# Altium PCB NumatoShield.PcbDoc (part 2 of 4)
Units mil, origin at the board's own origin, x right, y up, seen from the top; angles counter-clockwise.
Board outline 5000 x 5000 mil, 4 copper layers (Top Layer, Mid-Layer 1, Mid-Layer 2, Bottom Layer); 8 components, 163 nets, 352 pads, 43 vias.
Unrouted connection lines stored in the file: 11.
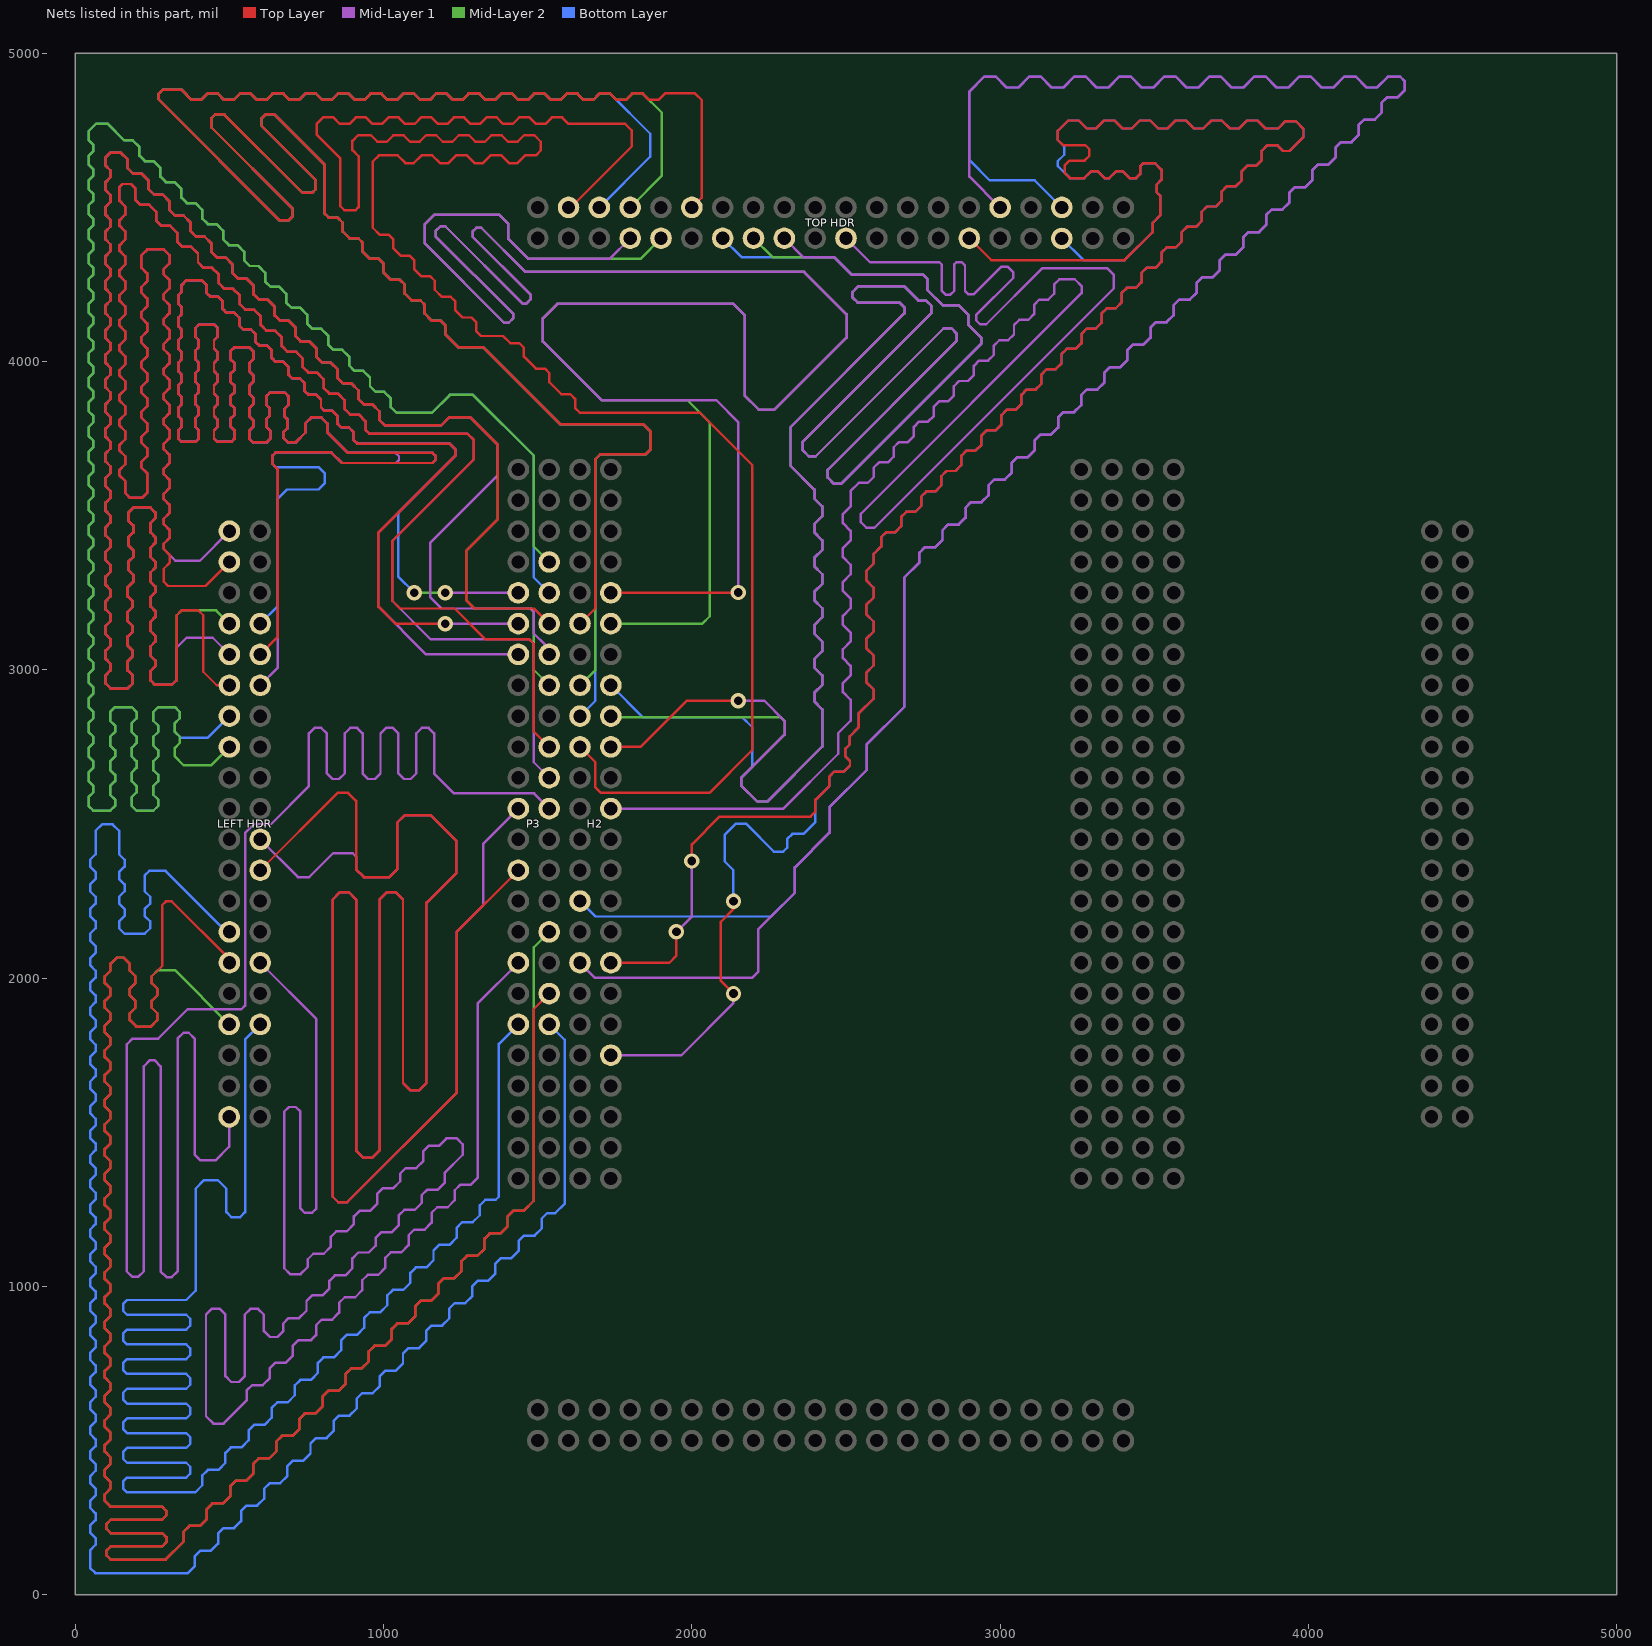
[diagram p4: the nets of this part, all layers, seen from the top]

## Via types
v1: diameter 50, hole 28, Top Layer to Bottom Layer, 43 vias

## Nets (pads, with @x,y where several pads share a name; then routed paths per layer and width w, separated by ;. In a path a pad name is that pad's centre, name@x,y a point inside that pad or via, vN(x,y) a via of type N, cw(c..) or ccw(c..) an arc to the next point about the centre after c; other vN are vias at no path point) (continued)
C13: "LEFT HDR.1" P3.29 | length 6979.7
  Top Layer w8: 500,3350 422,3272 301,3272 287,3286 287,3328 306,3347 306,3373 287,3392 287,3409 306,3428 306,3454 287,3473 287,3490 306,3509 306,3535 287,3554 287,3571 306,3590 306,3616 287,3635 287,3652 306,3671 306,3697 287,3716 287,3733 306,3752 306,3778 287,3797 287,3814 306,3833 306,3859 287,3878 287,3895 306,3914 306,3940 287,3959 287,3976 306,3995 306,4021 287,4040 287,4057 306,4076 306,4102 287,4121 287,4138 306,4157 306,4183 287,4202 287,4219 306,4238 306,4264 287,4283 287,4300 306,4319 306,4345 287,4364 234,4364 214,4344 214,4305 233,4286 233,4260 214,4241 214,4224 233,4205 233,4179 214,4160 214,4143 233,4124 233,4098 214,4079 214,4062 233,4043 233,4017 214,3998 214,3981 233,3962 233,3936 214,3917 214,3900 233,3881 233,3855 214,3836 214,3819 233,3800 233,3774 214,3755 214,3738 233,3719 233,3693 214,3674 214,3657 233,3638 233,3574 217,3558 178,3558 162,3574 162,3612 143,3631 143,3648 162,3667 162,3693 143,3712 143,3729 162,3748 162,3774 143,3793 143,3810 162,3829 162,3855 143,3874 143,3891 162,3910 162,3936 143,3955 143,3972 162,3991 162,4017 143,4036 143,4053 162,4072 162,4098 143,4117 143,4134 162,4153 162,4179 143,4198 143,4215 162,4234 162,4260 143,4279 143,4296 162,4315 162,4341 143,4360 143,4377 162,4396 162,4422 143,4441 143,4458 162,4477 162,4503 143,4522 143,4566 153,4576 181,4576 194,4563 194,4526 212,4508 240,4508 262,4486 262,4458 280,4440 308,4440 330,4418 330,4390 348,4372 376,4372 398,4350 398,4322 416,4304 444,4304 466,4282 466,4254 484,4236 512,4236 534,4214 534,4186 552,4168 580,4168 602,4146 602,4118 620,4100 648,4100 670,4078 670,4050 688,4032 716,4032 738,4010 738,3982 756,3964 784,3964 806,3942 806,3914 824,3896 852,3896 874,3874 874,3846 892,3828 920,3828 942,3806 942,3778 954,3766 1272,3766 1293,3745 1293,3683 1028,3418 1028,3224 1053,3199 1231,3199 1331,3099 1473,3099 1487,3085 1487,2800.2 P3.29@1537.2,2750
C14: "TOP HDR.36" H2.34 | length 6961
  Mid-Layer 2 w8: H2.34@1637.2,2950 1687,2999.8 1687,3683 1703,3699 1850,3699 1866,3715 1866,3773 1842,3797 1572.3,3797 1322.3,4047 1242,4047 1201,4088 1201,4117 1186,4132 1157,4132 1134,4155 1134,4184 1119,4199 1090,4199 1067,4222 1067,4251 1052,4266 1023,4266 1000,4289 1000,4318 985,4333 956,4333 933,4356 933,4385 918,4400 889,4400 866,4423 866,4452 851,4467 822,4467 809,4480 809,4639 645,4803 618,4803 604,4789 604,4765 780,4589 780,4559 768,4547 738,4547 483,4802 454,4802 441,4789 441,4760 704,4497 704,4470 692,4458 663,4458 270,4851 270,4868 284,4882 344,4882 377,4849 408,4849 429,4870 462,4870 483,4849 514,4849 535,4870 568,4870 589,4849 620,4849 641,4870 674,4870 695,4849 726,4849 747,4870 780,4870 801,4849 832,4849 853,4870 886,4870 907,4849 938,4849 959,4870 992,4870 1013,4849 1044,4849 1065,4870 1098,4870 1119,4849 1150,4849 1171,4870 1204,4870 1225,4849 1256,4849 1277,4870 1310,4870 1331,4849 1362,4849 1383,4870 1416,4870 1437,4849 1468,4849 1489,4870 1522,4870 1543,4849 1574,4849 1595,4870 1628,4870 1649,4849 1680,4849 1701,4870 1734,4870 1755,4849 1786,4849 1807,4870 1840,4870 1903,4807 1903,4603 1800,4500
C15: "LEFT HDR.3" P3.33 | length 6908.8
  Mid-Layer 2 w8: 500,3150 457,3193 345,3193 329,3177 329,2967 313,2951 259,2951 243,2967 243,2995 259,3011 259,3031 243,3047 243,3075 259,3091 259,3111 243,3127 243,3155 259,3171 259,3191 243,3207 243,3235 259,3251 259,3271 243,3287 243,3315 259,3331 259,3351 243,3367 243,3395 259,3411 259,3431 243,3447 243,3475 259,3491 259,3511 243,3527 189,3527 173,3511 173,3483 189,3467 189,3447 173,3431 173,3403 189,3387 189,3367 173,3351 173,3323 189,3307 189,3287 169,3267 169,3239 185,3223 185,3203 169,3187 169,3159 185,3143 185,3123 169,3107 169,3079 185,3063 185,3043 169,3027 169,2999 185,2983 185,2955 169,2939 115,2939 99,2955 99,2983 115,2999 115,3019 99,3035 99,3063 115,3079 115,3099 99,3115 99,3143 115,3159 115,3179 99,3195 99,3223 115,3239 115,3259 99,3275 99,3303 115,3319 115,3339 99,3355 99,3383 115,3399 115,3419 99,3435 99,3463 115,3479 115,3499 99,3515 99,3543 115,3559 115,3579 99,3595 99,3623 115,3639 115,3659 99,3675 99,3703 115,3719 115,3739 99,3755 99,3783 115,3799 115,3819 99,3835 99,3863 115,3879 115,3899 99,3915 99,3943 115,3959 115,3979 99,3995 99,4023 115,4039 115,4059 99,4075 99,4103 115,4119 115,4139 99,4155 99,4183 115,4199 115,4219 99,4235 99,4263 115,4279 115,4299 99,4315 99,4343 115,4359 115,4379 99,4395 99,4423 115,4439 115,4459 99,4475 99,4503 115,4519 115,4539 99,4555 99,4583 115,4599 115,4619 99,4635 99,4663 113,4677 148,4677 170,4655 170,4627 188,4609 216,4609 238,4587 238,4559 256,4541 284,4541 306,4519 306,4491 324,4473 352,4473 374,4451 374,4423 392,4405 420,4405 442,4383 442,4355 460,4337 488,4337 510,4315 510,4287 528,4269 556,4269 578,4247 578,4219 596,4201 624,4201 646,4179 646,4151 664,4133 692,4133 714,4111 714,4083 732,4065 760,4065 782,4043 782,4015 800,3997 828,3997 850,3975 850,3947 868,3929 896,3929 918,3907 918,3879 936,3861 964,3861 986,3839 986,3811 1004,3793 1187,3793 1214,3820 1280,3820 1371,3729 1371,3489 1268,3386 1268,3226 1295,3199 1476,3199 1487,3188 1487,3000.2 P3.33@1537.2,2950
C17: "LEFT HDR.4" P3.35 | length 6873.8
  Mid-Layer 1 w8: 500,3050 446,3104 361,3104 329,3072 329,2967 313,2951 259,2951 243,2967 243,2995 259,3011 259,3031 243,3047 243,3075 259,3091 259,3111 243,3127 243,3155 259,3171 259,3191 243,3207 243,3235 259,3251 259,3271 243,3287 243,3315 259,3331 259,3351 243,3367 243,3395 259,3411 259,3431 243,3447 243,3475 259,3491 259,3511 243,3527 189,3527 173,3511 173,3483 189,3467 189,3447 173,3431 173,3403 189,3387 189,3367 173,3351 173,3323 189,3307 189,3287 169,3267 169,3239 185,3223 185,3203 169,3187 169,3159 185,3143 185,3123 169,3107 169,3079 185,3063 185,3043 169,3027 169,2999 185,2983 185,2955 169,2939 115,2939 99,2955 99,2983 115,2999 115,3019 99,3035 99,3063 115,3079 115,3099 99,3115 99,3143 115,3159 115,3179 99,3195 99,3223 115,3239 115,3259 99,3275 99,3303 115,3319 115,3339 99,3355 99,3383 115,3399 115,3419 99,3435 99,3463 115,3479 115,3499 99,3515 99,3543 115,3559 115,3579 99,3595 99,3623 115,3639 115,3659 99,3675 99,3703 115,3719 115,3739 99,3755 99,3783 115,3799 115,3819 99,3835 99,3863 115,3879 115,3899 99,3915 99,3943 115,3959 115,3979 99,3995 99,4023 115,4039 115,4059 99,4075 99,4103 115,4119 115,4139 99,4155 99,4183 115,4199 115,4219 99,4235 99,4263 115,4279 115,4299 99,4315 99,4343 115,4359 115,4379 99,4395 99,4423 115,4439 115,4459 99,4475 99,4503 115,4519 115,4539 99,4555 99,4583 115,4599 115,4619 99,4635 99,4663 113,4677 148,4677 170,4655 170,4627 188,4609 216,4609 238,4587 238,4559 256,4541 284,4541 306,4519 306,4491 324,4473 352,4473 374,4451 374,4423 392,4405 420,4405 442,4383 442,4355 460,4337 488,4337 510,4315 510,4287 528,4269 556,4269 578,4247 578,4219 596,4201 624,4201 646,4179 646,4151 664,4133 692,4133 714,4111 714,4083 732,4065 760,4065 782,4043 782,4015 800,3997 828,3997 850,3975 850,3947 868,3929 896,3929 918,3907 918,3879 936,3861 964,3861 986,3839 986,3811 1004,3793 1187,3793 1214,3820 1280,3820 1371,3729 1371,3632 1152,3413 1152,3235 1188,3199 1476,3199 1487,3188 1487,3118 1525,3080 1525,3062.2 P3.35@1537.2,3050
C18: "LEFT HDR.34" P3.36 | length 6904.1
  Mid-Layer 1 w8: 600,2950 656,3006 656,3652 639,3669 639,3694 651,3706 830,3706 865,3671 1040,3671 1050,3681 1050,3693 1039,3704 884,3704 817,3771 817,3800 798,3819 766,3819 746,3799 746,3769 716,3739 689,3739 676,3752 676,3771 687,3782 687,3814 679,3822 679,3847 692,3860 692,3887 680,3899 631,3899 619,3887 619,3860 631,3848 631,3825 619,3813 619,3789 632,3776 632,3749 622,3739 575,3739 565,3749 565,3776 577,3788 577,3810 565,3822 565,3849 577,3861 577,3883 565,3895 565,3922 577,3934 577,3956 565,3968 565,3995 577,4007 577,4034 565,4046 516,4046 504,4034 504,4007 516,3995 516,3973 504,3961 504,3934 516,3922 516,3900 504,3888 504,3861 516,3849 516,3827 504,3815 504,3790 517,3777 517,3750 507,3740 460,3740 450,3750 450,3777 462,3789 462,3811 450,3823 450,3850 462,3862 462,3884 450,3896 450,3923 462,3935 462,3957 450,3969 450,3996 462,4008 462,4030 450,4042 450,4069 462,4081 462,4109 451,4120 401,4120 389,4108 389,4081 401,4069 401,4047 389,4035 389,4008 401,3996 401,3974 389,3962 389,3935 401,3923 401,3901 389,3889 389,3862 401,3850 401,3828 389,3816 389,3789 401,3777 401,3750 391,3740 344,3740 334,3750 334,3777 346,3789 346,3811 334,3823 334,3850 346,3862 346,3884 334,3896 334,3923 346,3935 346,3957 334,3969 334,3996 346,4008 346,4030 334,4042 334,4069 346,4081 346,4103 334,4115 334,4142 346,4154 346,4176 334,4188 334,4215 346,4227 346,4249 361,4264 410,4264 426,4248 426,4223 438,4211 463,4211 479,4195 479,4170 491,4158 516,4158 532,4142 532,4117 544,4105 569,4105 585,4089 585,4064 597,4052 622,4052 638,4036 638,4011 650,3999 675,3999 691,3983 691,3958 703,3946 728,3946 744,3930 744,3905 756,3893 781,3893 797,3877 797,3852 809,3840 834,3840 850,3824 850,3799 862,3787 887,3787 903,3771 903,3746 915,3734 1214,3734 1233,3715 1233,3695 983,3445 983,3205 1138,3050 P3.36@1437.2,3050
D6: "TOP HDR.17" H2.9 | length 6970.7
  Top Layer w8: v1(2135,1950) 2094,1991 2094,2183 2135,2224 v1(2135,2250)
  Mid-Layer 1 w8: H2.9@1737.2,1750 1966,1750 2135,1919 v1(2135,1950)
  Bottom Layer w8: v1(2135,2250) 2135,2350 2106,2379 2106,2464 2143,2501 2175,2501 2266,2410 2296,2410 2309,2423 2309,2451 2326,2468 2362,2468 2401,2507 2401,2578 2445,2622 2445,2653 2462,2670 2493,2670 2513,2690 2513,2704 2498,2719 2498,2744 2512,2758 2512,2784 2541,2813 2541,2858 2590,2907 2590,2936 2565,2961 2565,2990 2590,3015 2590,3046 2565,3071 2565,3100 2590,3125 2590,3156 2565,3181 2565,3210 2590,3235 2590,3266 2565,3291 2565,3320 2590,3345 2590,3376 2614,3400 2614,3430 2631,3447 2660,3447 2679,3466 2679,3496 2696,3513 2725,3513 2744,3532 2744,3562 2761,3579 2790,3579 2809,3598 2809,3628 2826,3645 2855,3645 2874,3664 2874,3694 2891,3711 2920,3711 2939,3730 2939,3760 2956,3777 2985,3777 3004,3796 3004,3826 3021,3843 3050,3843 3069,3862 3069,3892 3086,3909 3115,3909 3134,3928 3134,3958 3151,3975 3180,3975 3199,3994 3199,4024 3216,4041 3245,4041 3264,4060 3264,4090 3281,4107 3310,4107 3329,4126 3329,4156 3346,4173 3375,4173 3394,4192 3394,4222 3411,4239 3440,4239 3459,4258 3459,4288 3476,4305 3505,4305 3524,4324 3524,4354 3541,4371 3570,4371 3589,4390 3589,4420 3606,4437 3635,4437 3654,4456 3654,4486 3671,4503 3700,4503 3719,4522 3719,4552 3736,4569 3765,4569 3784,4588 3784,4618 3801,4635 3830,4635 3849,4654 3849,4684 3866,4701 3900,4701 3918,4683 3938,4683 3984,4729 3984,4755 3959,4780 3926,4780 3902,4756 3861,4756 3835,4782 3801,4782 3775,4756 3745,4756 3719,4782 3685,4782 3659,4756 3629,4756 3603,4782 3569,4782 3543,4756 3513,4756 3487,4782 3453,4782 3427,4756 3397,4756 3371,4782 3337,4782 3311,4756 3281,4756 3255,4782 3221,4782 3187,4748 3187,4719 3208,4698 3208,4671 3187,4650 3187,4634 3226,4595 3273,4595 3295,4617 3317,4617 3339,4595 3354,4595 3376,4617 3398,4617 3420,4595 3441,4595 3454,4608 3454,4633 3464,4643 3503,4643 3524,4622 3524,4590 3508,4574 3508,4549 3520,4537 3520,4475 3495,4450 3495,4420 3404,4329 3270.17,4329 3200,4399.17
D8: "LEFT HDR.14" P3.13 | length 6923.1
  Top Layer w8: 282,243 281,243 ; 500,2050 500,2062 313,2249 294,2249 282,2237 282,2040 248,2006 248,1984 266,1966 266,1944 248,1926 248,1904 266,1886 266,1864 245,1843 198,1843 177,1864 177,1886 195,1904 195,1926 177,1944 177,1966 195,1984 195,2006 177,2024 177,2046 156,2067 135,2067 114,2046 114,2024 96,2006 96,1984 114,1966 114,1944 96,1926 96,1904 114,1886 114,1864 96,1846 96,1824 114,1806 114,1784 96,1766 96,1744 114,1726 114,1704 96,1686 96,1664 114,1646 114,1624 96,1606 96,1584 114,1566 114,1544 96,1526 96,1504 114,1486 114,1464 96,1446 96,1424 114,1406 114,1384 96,1366 96,1344 114,1326 114,1304 96,1286 96,1264 114,1246 114,1224 96,1206 96,1184 114,1166 114,1144 96,1126 96,1104 114,1086 114,1064 96,1046 96,1024 114,1006 114,984 96,966 96,944 114,926 114,904 96,886 96,864 114,846 114,824 96,806 96,784 114,766 114,744 96,726 96,704 114,686 114,664 96,646 96,624 114,606 114,584 96,566 96,544 114,526 114,504 96,486 96,464 114,446 114,424 96,406 96,384 114,366 114,344 96,326 96,304 114,286 281,286 295,272 295,257 281,243 ; P3.13@1537.2,1950 1487,1899.8 1487,1278 1454,1245 1420,1245 1402,1227 1402,1195 1379,1172 1345,1172 1327,1154 1327,1122 1304,1099 1270,1099 1252,1081 1252,1049 1229,1026 1195,1026 1177,1008 1177,976 1154,953 1120,953 1102,935 1102,903 1079,880 1045,880 1027,862 1027,830 1004,807 970,807 952,789 952,757 929,734 895,734 877,716 877,684 854,661 820,661 802,643 802,611 779,588 745,588 727,570 727,538 704,515 670,515 652,497 652,465 629,442 595,442 577,424 577,392 554,369 520,369 502,351 502,319 479,296 445,296 427,278 427,246 404,223 370,223 352,205 352,173 293,114 115,114 101,128 101,143 115,157 282,157 296,171 296,186 282,200 115,200 101,214 101,229 115,243 281,243
D9: "LEFT HDR.16" P3.17 | length 6896.9
  Mid-Layer 2 w8: 499.17,1850 323.17,2026 268,2026 248,2006 248,1984 266,1966 266,1944 248,1926 248,1904 266,1886 266,1864 245,1843 198,1843 177,1864 177,1886 195,1904 195,1926 177,1944 177,1966 195,1984 195,2006 177,2024 177,2046 156,2067 135,2067 114,2046 114,2024 96,2006 96,1984 114,1966 114,1944 96,1926 96,1904 114,1886 114,1864 96,1846 96,1824 114,1806 114,1784 96,1766 96,1744 114,1726 114,1704 96,1686 96,1664 114,1646 114,1624 96,1606 96,1584 114,1566 114,1544 96,1526 96,1504 114,1486 114,1464 96,1446 96,1424 114,1406 114,1384 96,1366 96,1344 114,1326 114,1304 96,1286 96,1264 114,1246 114,1224 96,1206 96,1184 114,1166 114,1144 96,1126 96,1104 114,1086 114,1064 96,1046 96,1024 114,1006 114,984 96,966 96,944 114,926 114,904 96,886 96,864 114,846 114,824 96,806 96,784 114,766 114,744 96,726 96,704 114,686 114,664 96,646 96,624 114,606 114,584 96,566 96,544 114,526 114,504 96,486 96,464 114,446 114,424 96,406 96,384 114,366 114,344 96,326 96,304 114,286 281,286 295,272 295,257 281,243 115,243 101,229 101,214 115,200 282,200 296,186 296,171 282,157 115,157 101,143 101,128 115,114 293,114 352,173 352,205 370,223 404,223 427,246 427,278 445,296 479,296 502,319 502,351 520,369 554,369 577,392 577,424 595,442 629,442 652,465 652,497 670,515 704,515 727,538 727,570 745,588 779,588 802,611 802,643 820,661 854,661 877,684 877,716 895,734 929,734 952,757 952,789 970,807 1004,807 1027,830 1027,862 1045,880 1079,880 1102,903 1102,935 1120,953 1154,953 1177,976 1177,1008 1195,1026 1229,1026 1252,1049 1252,1081 1270,1099 1304,1099 1327,1122 1327,1154 1345,1172 1379,1172 1402,1195 1402,1227 1420,1245 1454,1245 1487,1278 1487,2099.8 P3.17@1537.2,2150
D11: "TOP HDR.10" H2.25 | length 6918.3
  Mid-Layer 1 w8: H2.25@1737.2,2550 2297,2550 2475,2728 2475,2795 2515,2835 2515,2903 2490,2928 2490,2957 2515,2982 2515,3013 2490,3038 2490,3067 2515,3092 2515,3121 2490,3146 2490,3175 2515,3200 2515,3231 2490,3256 2490,3285 2515,3310 2515,3341 2490,3366 2490,3395 2515,3420 2515,3451 2490,3476 2490,3505 2515,3530 2515,3580 2542,3607 2571,3607 2590,3626 2590,3656 2607,3673 2636,3673 2655,3692 2655,3722 2672,3739 2701,3739 2720,3758 2720,3788 2737,3805 2766,3805 2785,3824 2785,3854 2802,3871 2831,3871 2850,3890 2850,3920 2867,3937 2896,3937 2915,3956 2915,3986 2932,4003 2961,4003 2980,4022 2980,4052 2997,4069 3026,4069 3045,4088 3045,4118 3062,4135 3091,4135 3110,4154 3110,4184 3127,4201 3156,4201 3175,4220 3175,4250 3192,4267 3242,4267 3264,4245 3264,4222 2548,3506 2548,3479 2566,3461 2592,3461 3369,4238 3369,4281 3348,4302 3136,4302 2955,4121 2935,4121 2922,4134 2922,4151 3043,4272 3043,4289 3025,4307 3003,4307 2914,4218 2897,4218 2886,4229 2886,4312 2876,4322 2858,4322 2851,4315 2851,4229 2839,4217 2823,4217 2811,4229 2811,4314 2803,4322 2578,4322 2500,4400
D12: "LEFT HDR.0" P3.27 | length 6975.3
  Mid-Layer 1 w8: 500,3450 404,3354 325,3354 287,3392 287,3409 306,3428 306,3454 287,3473 287,3490 306,3509 306,3535 287,3554 287,3571 306,3590 306,3616 287,3635 287,3652 306,3671 306,3697 287,3716 287,3733 306,3752 306,3778 287,3797 287,3814 306,3833 306,3859 287,3878 287,3895 306,3914 306,3940 287,3959 287,3976 306,3995 306,4021 287,4040 287,4057 306,4076 306,4102 287,4121 287,4138 306,4157 306,4183 287,4202 287,4219 306,4238 306,4264 287,4283 287,4300 306,4319 306,4345 287,4364 234,4364 214,4344 214,4305 233,4286 233,4260 214,4241 214,4224 233,4205 233,4179 214,4160 214,4143 233,4124 233,4098 214,4079 214,4062 233,4043 233,4017 214,3998 214,3981 233,3962 233,3936 214,3917 214,3900 233,3881 233,3855 214,3836 214,3819 233,3800 233,3774 214,3755 214,3738 233,3719 233,3693 214,3674 214,3657 233,3638 233,3574 217,3558 178,3558 162,3574 162,3612 143,3631 143,3648 162,3667 162,3693 143,3712 143,3729 162,3748 162,3774 143,3793 143,3810 162,3829 162,3855 143,3874 143,3891 162,3910 162,3936 143,3955 143,3972 162,3991 162,4017 143,4036 143,4053 162,4072 162,4098 143,4117 143,4134 162,4153 162,4179 143,4198 143,4215 162,4234 162,4260 143,4279 143,4296 162,4315 162,4341 143,4360 143,4377 162,4396 162,4422 143,4441 143,4458 162,4477 162,4503 143,4522 143,4566 153,4576 181,4576 194,4563 194,4526 212,4508 240,4508 262,4486 262,4458 280,4440 308,4440 330,4418 330,4390 348,4372 376,4372 398,4350 398,4322 416,4304 444,4304 466,4282 466,4254 484,4236 512,4236 534,4214 534,4186 552,4168 580,4168 602,4146 602,4118 620,4100 648,4100 670,4078 670,4050 688,4032 716,4032 738,4010 738,3982 756,3964 784,3964 806,3942 806,3914 824,3896 852,3896 874,3874 874,3846 892,3828 920,3828 942,3806 942,3778 954,3766 1272,3766 1293,3745 1293,3683 1028,3418 1028,3224 1153,3099 1473,3099 1487,3085 1487,2700.2 P3.27@1537.2,2650
D14: "TOP HDR.6" H2.33 | length 7007
  Bottom Layer w8: H2.33@1737.2,2950 1840.2,2847 2163,2847 2196,2814 2196,2685 2160,2649 2160,2625 2212,2573 2245,2573 2423,2751 2423,2872 2398,2897 2398,2926 2423,2951 2423,2982 2398,3007 2398,3036 2423,3061 2423,3092 2398,3117 2398,3146 2423,3171 2423,3200 2398,3225 2398,3254 2423,3279 2423,3310 2398,3335 2398,3364 2423,3389 2423,3420 2398,3445 2398,3474 2423,3499 2423,3530 2398,3555 2398,3584 2320,3662 2320,3787 2690,4157 2690,4175 2674,4191 2538,4191 2521,4208 2521,4225 2541,4245 2688,4245 2735,4198 2760,4198 2777,4181 2777,4157 2359,3739 2359,3713 2379,3693 2402,3693 2817,4108 2842,4108 2859,4091 2859,4067 2441,3649 2441,3623 2461,3603 2484,3603 2938,4057 2938,4078 2897,4119 2897,4151 2865,4183 2813,4183 2763,4233 2763,4269 2751,4281 2519,4281 2461,4339 2161,4339 2100,4400
D17: "TOP HDR.4" H2.37 | length 6956.5
  Mid-Layer 2 w8: H2.37@1737.2,3150 2034,3150 2058,3174 2058,3802 1985,3875 1707,3875 1517,4065 1517,4141 1563,4187 2135,4187 2171,4151 2171,3890 2217,3844 2268,3844 2502,4078 2502,4153 2364,4291 1460,4291 1317,4434 1301,4434 1289,4422 1289,4405 1477,4217 1477,4202 1463,4188 1451,4188 1200,4439 1185,4439 1169,4423 1169,4406 1421,4154 1421,4141 1406,4126 1391,4126 1133,4384 1133,4445 1165,4477 1374,4477 1405,4446 1405,4398 1470,4333 1833,4333 1900,4400
D18: "TOP HDR.34" H2.38 | length 6902.1
  Top Layer w8: H2.38@1637.2,3150 1687,3199.8 1687,3683 1703,3699 1850,3699 1866,3715 1866,3773 1842,3797 1572.3,3797 1322.3,4047 1242,4047 1201,4088 1201,4117 1186,4132 1157,4132 1134,4155 1134,4184 1119,4199 1090,4199 1067,4222 1067,4251 1052,4266 1023,4266 1000,4289 1000,4318 985,4333 956,4333 933,4356 933,4385 918,4400 889,4400 866,4423 866,4452 851,4467 822,4467 809,4480 809,4639 645,4803 618,4803 604,4789 604,4765 780,4589 780,4559 768,4547 738,4547 483,4802 454,4802 441,4789 441,4760 704,4497 704,4470 692,4458 663,4458 270,4851 270,4868 284,4882 344,4882 377,4849 408,4849 429,4870 462,4870 483,4849 514,4849 535,4870 568,4870 589,4849 620,4849 641,4870 674,4870 695,4849 726,4849 747,4870 780,4870 801,4849 832,4849 853,4870 886,4870 907,4849 938,4849 959,4870 992,4870 1013,4849 1044,4849 1065,4870 1098,4870 1119,4849 1150,4849 1171,4870 1204,4870 1225,4849 1256,4849 1277,4870 1310,4870 1331,4849 1362,4849 1383,4870 1416,4870 1437,4849 1468,4849 1489,4870 1522,4870 1543,4849 1574,4849 1595,4870 1628,4870 1649,4849 1680,4849 1701,4870 1734,4870 1755,4849 1786,4849 1807,4870 1840,4870 1861,4849 1892,4849 1913,4870 2010,4870 2032,4848 2032,4532 2000,4500
E6: "LEFT HDR.23" P3.12 | length 6968.3
  Bottom Layer w8: 600,1850 551,1801 551,1241 535,1225 506,1225 490,1241 490,1317 462,1345 418,1345 390,1317 390,986 360,956 168,956 155,943 155,921 168,908 360,908 373,895 373,873 360,860 168,860 155,847 155,825 168,812 360,812 373,799 373,777 360,764 168,764 155,751 155,729 168,716 360,716 373,703 373,681 360,668 168,668 155,655 155,633 168,620 360,620 373,607 373,585 360,572 168,572 155,559 155,537 168,524 360,524 373,511 373,489 360,476 168,476 155,463 155,441 168,428 360,428 373,415 373,393 360,380 168,380 155,367 155,345 168,332 389,332 412,355 412,387 430,405 464,405 487,428 487,460 505,478 539,478 562,501 562,533 580,551 614,551 637,574 637,606 655,624 689,624 712,647 712,679 730,697 764,697 787,720 787,752 805,770 839,770 862,793 862,825 880,843 914,843 937,866 937,898 955,916 989,916 1012,939 1012,971 1030,989 1064,989 1087,1012 1087,1044 1105,1062 1139,1062 1162,1085 1162,1117 1180,1135 1214,1135 1237,1158 1237,1190 1255,1208 1289,1208 1312,1231 1312,1263 1330,1281 1364,1281 1374,1291 1374,1786.79 P3.12@1437.21,1850
E7: "TOP HDR.14" H2.15 | length 6943.4
  Top Layer w8: H2.15@1737.2,2050 1927,2050 1950,2073 v1(1950,2150) ; v1(2000,2380) 2000,2434 2090,2524 2385,2524 2401,2540 2401,2578 2445,2622 2445,2653 2462,2670 2493,2670 2513,2690 2513,2704 2498,2719 2498,2744 2512,2758 2512,2784 2541,2813 2541,2858 2590,2907 2590,2936 2565,2961 2565,2990 2590,3015 2590,3046 2565,3071 2565,3100 2590,3125 2590,3156 2565,3181 2565,3210 2590,3235 2590,3266 2565,3291 2565,3320 2590,3345 2590,3376 2614,3400 2614,3430 2631,3447 2660,3447 2679,3466 2679,3496 2696,3513 2725,3513 2744,3532 2744,3562 2761,3579 2790,3579 2809,3598 2809,3628 2826,3645 2855,3645 2874,3664 2874,3694 2891,3711 2920,3711 2939,3730 2939,3760 2956,3777 2985,3777 3004,3796 3004,3826 3021,3843 3050,3843 3069,3862 3069,3892 3086,3909 3115,3909 3134,3928 3134,3958 3151,3975 3180,3975 3199,3994 3199,4024 3216,4041 3245,4041 3264,4060 3264,4090 3281,4107 3310,4107 3329,4126 3329,4156 3346,4173 3375,4173 3394,4192 3394,4222 3411,4239 3440,4239 3459,4258 3459,4288 3476,4305 3505,4305 3524,4324 3524,4354 3541,4371 3570,4371 3589,4390 3589,4420 3606,4437 3635,4437 3654,4456 3654,4486 3671,4503 3700,4503 3719,4522 3719,4552 3736,4569 3765,4569 3784,4588 3784,4618 3801,4635 3830,4635 3849,4654 3849,4684 3866,4701 3900,4701 3918,4683 3938,4683 3984,4729 3984,4755 3959,4780 3926,4780 3902,4756 3861,4756 3835,4782 3801,4782 3775,4756 3745,4756 3719,4782 3685,4782 3659,4756 3629,4756 3603,4782 3569,4782 3543,4756 3513,4756 3487,4782 3453,4782 3427,4756 3397,4756 3371,4782 3337,4782 3311,4756 3281,4756 3255,4782 3221,4782 3187,4748 3187,4719 3204,4702 3276,4702 3289,4689 3289,4667 3274,4652 3225,4652 3209,4636 3209,4612 3226,4595 3273,4595 3295,4617 3317,4617 3339,4595 3354,4595 3376,4617 3398,4617 3420,4595 3441,4595 3454,4608 3454,4633 3464,4643 3503,4643 3524,4622 3524,4590 3508,4574 3508,4549 3520,4537 3520,4475 3495,4450 3495,4420 3404,4329 2971,4329 2900,4400
  Mid-Layer 1 w8: v1(1950,2150) 2000,2200 v1(2000,2380)
E8: "TOP HDR.24" H2.16 | length 6899.1
  Mid-Layer 1 w8: H2.16@1637.21,2050 1686.21,2001 2195,2001 2216,2022 2216,2159 2334,2277 2334,2359 2447,2472 2447,2555 2568,2676 2568,2759 2689,2880 2689,3299 2738,3348 2738,3380 2756,3398 2790,3398 2813,3421 2813,3453 2831,3471 2865,3471 2888,3494 2888,3526 2906,3544 2940,3544 2963,3567 2963,3599 2981,3617 3015,3617 3038,3640 3038,3672 3056,3690 3090,3690 3113,3713 3113,3745 3131,3763 3165,3763 3188,3786 3188,3818 3206,3836 3240,3836 3263,3859 3263,3891 3281,3909 3315,3909 3338,3932 3338,3964 3356,3982 3390,3982 3413,4005 3413,4037 3431,4055 3465,4055 3488,4078 3488,4110 3506,4128 3540,4128 3563,4151 3563,4183 3581,4201 3615,4201 3638,4224 3638,4256 3656,4274 3690,4274 3713,4297 3713,4329 3731,4347 3765,4347 3788,4370 3788,4402 3806,4420 3840,4420 3863,4443 3863,4475 3881,4493 3915,4493 3938,4516 3938,4548 3956,4566 3990,4566 4013,4589 4013,4621 4031,4639 4065,4639 4088,4662 4088,4694 4106,4712 4140,4712 4163,4735 4163,4767 4181,4785 4215,4785 4238,4808 4238,4840 4256,4858 4290,4858 4313,4881 4313,4909 4298,4924 4258,4924 4223,4889 4189,4889 4154,4924 4116,4924 4081,4889 4043,4889 4008,4924 3970,4924 3935,4889 3897,4889 3862,4924 3824,4924 3789,4889 3751,4889 3716,4924 3678,4924 3643,4889 3605,4889 3570,4924 3532,4924 3497,4889 3459,4889 3424,4924 3386,4924 3351,4889 3313,4889 3278,4924 3240,4924 3205,4889 3167,4889 3132,4924 3094,4924 3059,4889 3021,4889 2986,4924 2948,4924 2900,4876 2900,4600 3000,4500
E11: "LEFT HDR.29" P3.26 | length 6938
  Mid-Layer 1 w8: 600,2450 722,2328 759,2328 836,2405 900,2405 911,2394 911,2353 936,2328 1019,2328 1044,2353 1044,2504 1069,2529 1152,2529 1236,2445 1236,2341 1139,2244 1139,1660 1115,1636 1087,1636 1063,1660 1063,2255 1039,2279 1011,2279 987,2255 987,1441 963,1417 935,1417 911,1441 911,2255 887,2279 859,2279 835,2255 835,1291 853,1273 882,1273 1237,1628 1237,2149.8 1324,2236.8 1324,2436.8 P3.26@1437.2,2550
E12: "TOP HDR.38" H2.30 | length 7035
  Top Layer w8: 1600,4500 1607,4500 1805,4698 1805,4750 1784,4771 1600,4771 1579,4792 1546,4792 1525,4771 1494,4771 1473,4792 1440,4792 1419,4771 1388,4771 1367,4792 1334,4792 1313,4771 1282,4771 1261,4792 1228,4792 1207,4771 1176,4771 1155,4792 1122,4792 1101,4771 1070,4771 1049,4792 1016,4792 995,4771 964,4771 943,4792 910,4792 889,4771 858,4771 837,4792 804,4792 783,4771 783,4736 860,4659 860,4504 873,4491 909,4491 919,4501 919,4666 899,4686 899,4716 917,4734 959,4734 980,4713 1011,4713 1032,4734 1065,4734 1086,4713 1117,4713 1138,4734 1171,4734 1192,4713 1223,4713 1244,4734 1277,4734 1298,4713 1329,4713 1350,4734 1383,4734 1404,4713 1435,4713 1456,4734 1489,4734 1510,4713 1510,4685 1494,4669 1459,4669 1434,4644 1407,4644 1382,4669 1347,4669 1322,4644 1295,4644 1270,4669 1235,4669 1210,4644 1183,4644 1158,4669 1123,4669 1098,4644 1071,4644 1046,4669 985,4669 965,4649 965,4434 988,4411 1017,4411 1032,4396 1032,4367 1055,4344 1084,4344 1099,4329 1099,4300 1122,4277 1151,4277 1166,4262 1166,4233 1189,4210 1218,4210 1233,4195 1233,4166 1256,4143 1285,4143 1300,4128 1300,4099 1316,4083 1388,4083 1411,4060 1440,4060 1455,4045 1455,4016 1494,3977 1523,3977 1538,3962 1538,3933 1577,3894 1606,3894 1621,3879 1621,3850 1637,3834 2026,3834 2196,3664 2196,2740 2057,2601 1705,2601 1687,2619 1687,2700.2 H2.30@1637.2,2750
E13: "TOP HDR.37" H2.32 | length 6991.5
  Bottom Layer w8: H2.32@1637.2,2850 1687,2899.8 1687,3683 1703,3699 1850,3699 1866,3715 1866,3773 1842,3797 1572.3,3797 1322.3,4047 1242,4047 1201,4088 1201,4117 1186,4132 1157,4132 1134,4155 1134,4184 1119,4199 1090,4199 1067,4222 1067,4251 1052,4266 1023,4266 1000,4289 1000,4318 985,4333 956,4333 933,4356 933,4385 918,4400 889,4400 866,4423 866,4452 851,4467 822,4467 809,4480 809,4639 645,4803 618,4803 604,4789 604,4765 780,4589 780,4559 768,4547 738,4547 483,4802 454,4802 441,4789 441,4760 704,4497 704,4470 692,4458 663,4458 270,4851 270,4868 284,4882 344,4882 377,4849 408,4849 429,4870 462,4870 483,4849 514,4849 535,4870 568,4870 589,4849 620,4849 641,4870 674,4870 695,4849 726,4849 747,4870 780,4870 801,4849 832,4849 853,4870 886,4870 907,4849 938,4849 959,4870 992,4870 1013,4849 1044,4849 1065,4870 1098,4870 1119,4849 1150,4849 1171,4870 1204,4870 1225,4849 1256,4849 1277,4870 1310,4870 1331,4849 1362,4849 1383,4870 1416,4870 1437,4849 1468,4849 1489,4870 1522,4870 1543,4849 1574,4849 1595,4870 1628,4870 1649,4849 1680,4849 1701,4870 1734,4870 1865,4739 1865,4665 1700,4500
E16: "LEFT HDR.5" P3.37 | length 6905.3
  Top Layer w8: 188.5,3286.5 169,3267 169,3239 185,3223 185,3203 169,3187 169,3159 185,3143 185,3123 169,3107 169,3079 185,3063 185,3043 169,3027 169,2999 185,2983 185,2955 169,2939 115,2939 99,2955 99,2983 115,2999 115,3019 99,3035 99,3063 115,3079 115,3099 99,3115 99,3143 115,3159 115,3179 99,3195 99,3223 115,3239 115,3259 99,3275 99,3303 115,3319 115,3339 99,3355 99,3383 115,3399 115,3419 99,3435 99,3463 115,3479 115,3499 99,3515 99,3543 115,3559 115,3579 99,3595 99,3623 115,3639 115,3659 99,3675 99,3703 115,3719 115,3739 99,3755 99,3783 115,3799 115,3819 99,3835 99,3863 115,3879 115,3899 99,3915 99,3943 115,3959 115,3979 99,3995 99,4023 115,4039 115,4059 99,4075 99,4103 115,4119 115,4139 99,4155 99,4183 115,4199 115,4219 99,4235 99,4263 115,4279 115,4299 99,4315 99,4343 115,4359 115,4379 99,4395 99,4423 115,4439 115,4459 99,4475 99,4503 115,4519 115,4539 99,4555 99,4583 115,4599 115,4619 99,4635 99,4663 113,4677 148,4677 170,4655 170,4627 188,4609 216,4609 238,4587 238,4559 256,4541 284,4541 306,4519 306,4491 324,4473 352,4473 374,4451 374,4423 392,4405 420,4405 442,4383 442,4355 460,4337 488,4337 510,4315 510,4287 528,4269 556,4269 578,4247 578,4219 596,4201 624,4201 646,4179 646,4151 664,4133 692,4133 714,4111 714,4083 732,4065 760,4065 782,4043 782,4015 800,3997 828,3997 850,3975 850,3947 868,3929 896,3929 918,3907 918,3879 936,3861 964,3861 986,3839 986,3811 1004,3793 1187,3793 1214,3820 1280,3820 1371,3729 1371,3489 1268,3386 1268,3226 1295,3199 1488.2,3199 P3.37@1537.2,3150 ; 189,3287 189,3307 173,3323 173,3351 189,3367 189,3387 173,3403 173,3431 189,3447 189,3467 173,3483 173,3511 189,3527 243,3527 259,3511 259,3491 243,3475 243,3447 259,3431 259,3411 243,3395 243,3367 259,3351 259,3331 243,3315 243,3287 259,3271 259,3251 243,3235 243,3207 259,3191 259,3171 243,3155 243,3127 259,3111 259,3091 243,3075 243,3047 259,3031 259,3011 243,2995 243,2967 259,2951 313,2951 329,2967 329,3177 345,3193 399,3193 415,3177 415,2994 459,2950 500,2950
E18: "LEFT HDR.35" P3.38 | length 7000.7
  Top Layer w8: 600,3050 656,3106 656,3652 639,3669 639,3694 651,3706 830,3706 865,3671 1159,3671 1169,3681 1169,3694 1159,3704 884,3704 817,3771 817,3800 798,3819 766,3819 746,3799 746,3769 716,3739 689,3739 676,3752 676,3771 687,3782 687,3814 679,3822 679,3847 692,3860 692,3887 680,3899 631,3899 619,3887 619,3860 631,3848 631,3825 619,3813 619,3789 632,3776 632,3749 622,3739 575,3739 565,3749 565,3776 577,3788 577,3810 565,3822 565,3849 577,3861 577,3883 565,3895 565,3922 577,3934 577,3956 565,3968 565,3995 577,4007 577,4034 565,4046 516,4046 504,4034 504,4007 516,3995 516,3973 504,3961 504,3934 516,3922 516,3900 504,3888 504,3861 516,3849 516,3827 504,3815 504,3790 517,3777 517,3750 507,3740 460,3740 450,3750 450,3777 462,3789 462,3811 450,3823 450,3850 462,3862 462,3884 450,3896 450,3923 462,3935 462,3957 450,3969 450,3996 462,4008 462,4030 450,4042 450,4069 462,4081 462,4108 450,4120 401,4120 389,4108 389,4081 401,4069 401,4047 389,4035 389,4008 401,3996 401,3974 389,3962 389,3935 401,3923 401,3901 389,3889 389,3862 401,3850 401,3828 389,3816 389,3789 401,3777 401,3750 391,3740 344,3740 334,3750 334,3777 346,3789 346,3811 334,3823 334,3850 346,3862 346,3884 334,3896 334,3923 346,3935 346,3957 334,3969 334,3996 346,4008 346,4030 334,4042 334,4069 346,4081 346,4103 334,4115 334,4142 346,4154 346,4176 334,4188 334,4215 346,4227 346,4249 361,4264 410,4264 426,4248 426,4223 438,4211 463,4211 479,4195 479,4170 491,4158 516,4158 532,4142 532,4117 544,4105 569,4105 585,4089 585,4064 597,4052 622,4052 638,4036 638,4011 650,3999 675,3999 691,3983 691,3958 703,3946 728,3946 744,3930 744,3905 756,3893 781,3893 797,3877 797,3852 809,3840 834,3840 850,3824 850,3799 862,3787 887,3787 903,3771 903,3746 915,3734 1214,3734 1233,3715 1233,3695 983,3445 983,3205 1038,3150 v1(1200,3150)
  Mid-Layer 1 w8: v1(1200,3150) P3.38@1437.2,3150
F7: "LEFT HDR.13" P3.11 | length 6887.4
  Bottom Layer w8: 500,2150 491,2150 293,2348 240,2348 225,2333 225,2282 243,2264 243,2242 225,2224 225,2202 243,2184 243,2162 225,2144 160,2144 142,2162 142,2184 160,2202 160,2224 142,2242 142,2264 160,2282 160,2304 142,2322 142,2344 160,2362 160,2384 142,2402 142,2478 121,2499 87,2499 66,2478 66,2402 48,2384 48,2362 66,2344 66,2322 48,2304 48,2282 66,2264 66,2242 48,2224 48,2202 66,2184 66,2162 48,2144 48,2122 66,2104 66,2082 48,2064 48,2042 66,2024 66,2002 48,1984 48,1962 66,1944 66,1922 48,1904 48,1882 66,1864 66,1842 48,1824 48,1802 66,1784 66,1762 48,1744 48,1722 66,1704 66,1682 48,1664 48,1642 66,1624 66,1602 48,1584 48,1562 66,1544 66,1522 48,1504 48,1482 66,1464 66,1442 48,1424 48,1402 66,1384 66,1362 48,1344 48,1322 66,1304 66,1282 48,1264 48,1242 66,1224 66,1202 48,1184 48,1162 66,1144 66,1122 48,1104 48,1082 66,1064 66,1042 48,1024 48,1002 66,984 66,962 48,944 48,922 66,904 66,882 48,864 48,842 66,824 66,802 48,784 48,762 66,744 66,722 48,704 48,682 66,664 66,642 48,624 48,602 66,584 66,562 48,544 48,522 66,504 66,482 48,464 48,442 66,424 66,402 48,384 48,362 66,344 66,322 48,304 48,282 66,264 66,242 48,224 48,202 66,184 66,162 48,144 48,87 65,70 365,70 388,93 388,125 406,143 440,143 463,166 463,198 481,216 515,216 538,239 538,271 556,289 590,289 613,312 613,344 631,362 665,362 688,385 688,417 706,435 740,435 763,458 763,490 781,508 815,508 838,531 838,563 856,581 890,581 913,604 913,636 931,654 965,654 988,677 988,709 1006,727 1040,727 1063,750 1063,782 1081,800 1115,800 1138,823 1138,855 1156,873 1190,873 1213,896 1213,928 1231,946 1265,946 1288,969 1288,1001 1306,1019 1340,1019 1363,1042 1363,1074 1381,1092 1415,1092 1438,1115 1438,1147 1456,1165 1490,1165 1513,1188 1513,1220 1531,1238 1557,1238 1587,1268 1587,1800.2 P3.11@1537.2,1850
F8: "LEFT HDR.25" P3.16 | length 6943.9
  Mid-Layer 1 w8: 600,2050 782,1868 782,1253 768,1239 744,1239 730,1253 730,1567 715,1582 693,1582 678,1567 678,1059 697,1040 731,1040 754,1063 754,1088 772,1106 806,1106 829,1129 829,1161 847,1179 881,1179 904,1202 904,1227 922,1245 956,1245 979,1268 979,1300 997,1318 1031,1318 1054,1341 1054,1366 1072,1384 1106,1384 1129,1407 1129,1439 1147,1457 1181,1457 1204,1480 1238,1480 1257,1461 1257,1427 1199,1369 1199,1337 1176,1314 1142,1314 1124,1296 1124,1271 1101,1248 1067,1248 1049,1230 1049,1198 1026,1175 992,1175 974,1157 974,1132 952,1110 918,1110 899,1091 899,1059 876,1036 842,1036 824,1018 824,993 802,971 768,971 750,953 750,921 726,897 692,897 674,879 674,854 656,836 631,836 612,855 612,908 593,927 568,927 549,908 549,708 531,690 506,690 487,709 487,909 468,928 443,928 424,909 424,579 448,555 481,555 556,630 556,662 574,680 608,680 631,703 631,735 649,753 683,753 706,776 706,808 724,826 765,826 781,842 781,874 799,892 833,892 856,915 856,947 874,965 908,965 931,988 931,1020 949,1038 983,1038 1006,1061 1006,1093 1024,1111 1058,1111 1081,1134 1081,1166 1099,1184 1133,1184 1156,1207 1156,1239 1174,1257 1208,1257 1231,1280 1231,1312 1249,1330 1283,1330 1306,1353 1306,1918.79 P3.16@1437.21,2050
F9: "TOP HDR.22" H2.20 | length 6905.2
  Bottom Layer w8: H2.20@1637.2,2250 1687.2,2200 2257,2200 2334,2277 2334,2359 2447,2472 2447,2555 2568,2676 2568,2759 2689,2880 2689,3299 2738,3348 2738,3380 2756,3398 2790,3398 2813,3421 2813,3453 2831,3471 2865,3471 2888,3494 2888,3526 2906,3544 2940,3544 2963,3567 2963,3599 2981,3617 3015,3617 3038,3640 3038,3672 3056,3690 3090,3690 3113,3713 3113,3745 3131,3763 3165,3763 3188,3786 3188,3818 3206,3836 3240,3836 3263,3859 3263,3891 3281,3909 3315,3909 3338,3932 3338,3964 3356,3982 3390,3982 3413,4005 3413,4037 3431,4055 3465,4055 3488,4078 3488,4110 3506,4128 3540,4128 3563,4151 3563,4183 3581,4201 3615,4201 3638,4224 3638,4256 3656,4274 3690,4274 3713,4297 3713,4329 3731,4347 3765,4347 3788,4370 3788,4402 3806,4420 3840,4420 3863,4443 3863,4475 3881,4493 3915,4493 3938,4516 3938,4548 3956,4566 3990,4566 4013,4589 4013,4621 4031,4639 4065,4639 4088,4662 4088,4694 4106,4712 4140,4712 4163,4735 4163,4767 4181,4785 4215,4785 4238,4808 4238,4840 4256,4858 4290,4858 4313,4881 4313,4909 4298,4924 4258,4924 4223,4889 4189,4889 4154,4924 4116,4924 4081,4889 4043,4889 4008,4924 3970,4924 3935,4889 3897,4889 3862,4924 3824,4924 3789,4889 3751,4889 3716,4924 3678,4924 3643,4889 3605,4889 3570,4924 3532,4924 3497,4889 3459,4889 3424,4924 3386,4924 3351,4889 3313,4889 3278,4924 3240,4924 3205,4889 3167,4889 3132,4924 3094,4924 3059,4889 3021,4889 2986,4924 2948,4924 2900,4876 2900,4654 2966,4588 3112,4588 3200,4500
F10: "LEFT HDR.28" P3.22 | length 6946.7
  Top Layer w8: 600,2350 851,2601 885,2601 911,2575 911,2353 936,2328 1019,2328 1044,2353 1044,2504 1069,2529 1152,2529 1236,2445 1236,2341 1139,2244 1139,1660 1115,1636 1087,1636 1063,1660 1063,2255 1039,2279 1011,2279 987,2255 987,1441 963,1417 935,1417 911,1441 911,2255 887,2279 859,2279 835,2255 835,1291 853,1273 882,1273 1237,1628 1237,2149.8 P3.22@1437.2,2350
F11: "LEFT HDR.19" P3.25 | length 6992.3
  Mid-Layer 1 w8: 499.17,1550 499.17,1453.17 455,1409 406,1409 387,1428 387,1804 368,1823 351,1823 332,1804 332,1049 313,1030 296,1030 277,1049 277,1714 258,1733 241,1733 222,1714 222,1049 204,1031 185,1031 167,1049 167,1785 186,1804 269,1804 364,1899 539,1899 551,1911 551,2471 579,2499 634,2499 758,2623 758,2794 776,2812 798,2812 816,2794 816,2664 834,2646 856,2646 874,2664 874,2794 892,2812 914,2812 932,2794 932,2664 950,2646 972,2646 990,2664 990,2794 1008,2812 1030,2812 1048,2794 1048,2664 1066,2646 1088,2646 1106,2664 1106,2794 1124,2812 1146,2812 1164,2794 1164,2664 1229,2599 1488.2,2599 P3.25@1537.2,2550
F12: "TOP HDR.8" H2.29 | length 7008.6
  Top Layer w8: H2.29@1737.2,2750 1834,2750 1984,2900 v1(2150,2900)
  Mid-Layer 1 w8: v1(2150,2900) 2235,2900 2301,2834 2301,2790 2160,2649 2160,2625 2212,2573 2245,2573 2423,2751 2423,2872 2398,2897 2398,2926 2423,2951 2423,2982 2398,3007 2398,3036 2423,3061 2423,3092 2398,3117 2398,3146 2423,3171 2423,3200 2398,3225 2398,3254 2423,3279 2423,3310 2398,3335 2398,3364 2423,3389 2423,3420 2398,3445 2398,3474 2423,3499 2423,3530 2398,3555 2398,3584 2320,3662 2320,3787 2690,4157 2690,4175 2674,4191 2538,4191 2521,4208 2521,4225 2541,4245 2688,4245 2735,4198 2760,4198 2777,4181 2777,4157 2359,3739 2359,3713 2379,3693 2402,3693 2817,4108 2842,4108 2859,4091 2859,4067 2441,3649 2441,3623 2461,3603 2484,3603 2938,4057 2938,4078 2897,4119 2897,4151 2865,4183 2813,4183 2763,4233 2763,4269 2751,4281 2519,4281 2461,4339 2361,4339 2300,4400
F13: "TOP HDR.7" H2.31 | length 7024.6
  Mid-Layer 2 w8: H2.31@1737.2,2847 2288,2847 2301,2834 2301,2790 2160,2649 2160,2625 2212,2573 2245,2573 2423,2751 2423,2872 2398,2897 2398,2926 2423,2951 2423,2982 2398,3007 2398,3036 2423,3061 2423,3092 2398,3117 2398,3146 2423,3171 2423,3200 2398,3225 2398,3254 2423,3279 2423,3310 2398,3335 2398,3364 2423,3389 2423,3420 2398,3445 2398,3474 2423,3499 2423,3530 2398,3555 2398,3584 2320,3662 2320,3787 2690,4157 2690,4175 2674,4191 2538,4191 2521,4208 2521,4225 2541,4245 2688,4245 2735,4198 2760,4198 2777,4181 2777,4157 2359,3739 2359,3713 2379,3693 2402,3693 2817,4108 2842,4108 2859,4091 2859,4067 2441,3649 2441,3623 2461,3603 2484,3603 2938,4057 2938,4078 2897,4119 2897,4151 2865,4183 2813,4183 2763,4233 2763,4269 2751,4281 2519,4281 2461,4339 2261,4339 2200,4400
F14: "LEFT HDR.7" P3.41 | length 6899.4
  Mid-Layer 2 w8: 500,2750 440,2690 352,2690 323,2719 323,2747 339,2763 339,2783 323,2799 323,2827 339,2843 339,2863 323,2879 269,2879 253,2863 253,2835 269,2819 269,2799 253,2783 253,2755 269,2739 269,2719 253,2703 253,2675 269,2659 269,2639 253,2623 253,2595 269,2579 269,2559 253,2543 199,2543 183,2559 183,2587 199,2603 199,2623 183,2639 183,2667 199,2683 199,2703 183,2719 183,2747 199,2763 199,2783 183,2799 183,2827 199,2843 199,2863 183,2879 129,2879 113,2863 113,2835 129,2819 129,2799 113,2783 113,2755 129,2739 129,2719 113,2703 113,2675 129,2659 129,2639 113,2623 113,2595 129,2579 129,2559 113,2543 59,2543 43,2559 43,2587 59,2603 59,2623 43,2639 43,2667 59,2683 59,2703 43,2719 43,2747 59,2763 59,2783 43,2799 43,2827 59,2843 59,2863 43,2879 43,2907 59,2923 59,2943 43,2959 43,2987 59,3003 59,3023 43,3039 43,3067 59,3083 59,3103 43,3119 43,3147 59,3163 59,3183 43,3199 43,3227 59,3243 59,3263 43,3279 43,3307 59,3323 59,3343 43,3359 43,3387 59,3403 59,3423 43,3439 43,3467 59,3483 59,3503 43,3519 43,3547 59,3563 59,3583 43,3599 43,3627 59,3643 59,3663 43,3679 43,3707 59,3723 59,3743 43,3759 43,3787 59,3803 59,3823 43,3839 43,3867 59,3883 59,3903 43,3919 43,3947 59,3963 59,3983 43,3999 43,4027 59,4043 59,4063 43,4079 43,4107 59,4123 59,4143 43,4159 43,4187 59,4203 59,4223 43,4239 43,4267 59,4283 59,4303 43,4319 43,4347 59,4363 59,4383 43,4399 43,4427 59,4443 59,4463 43,4479 43,4507 59,4523 59,4543 43,4559 43,4587 59,4603 59,4623 43,4639 43,4667 59,4683 59,4703 43,4719 43,4747 68,4772 104,4772 158,4718 186,4718 208,4696 208,4668 226,4650 254,4650 276,4628 276,4600 294,4582 322,4582 344,4560 344,4532 362,4514 390,4514 412,4492 412,4464 430,4446 458,4446 480,4424 480,4396 498,4378 526,4378 548,4356 548,4328 566,4310 594,4310 616,4288 616,4260 634,4242 662,4242 684,4220 684,4192 702,4174 730,4174 752,4152 752,4124 770,4106 798,4106 820,4084 820,4056 838,4038 866,4038 888,4016 888,3988 906,3970 934,3970 956,3948 956,3920 974,3902 1002,3902 1024,3880 1024,3852 1042,3834 1157,3834 1215,3892 1290,3892 1487,3695 1487,3400.2 P3.41@1537.2,3350
F15: "LEFT HDR.6" P3.39 | length 6906.1
  Bottom Layer w8: 500,2850 430,2780 342,2780 323,2799 323,2827 339,2843 339,2863 323,2879 269,2879 253,2863 253,2835 269,2819 269,2799 253,2783 253,2755 269,2739 269,2719 253,2703 253,2675 269,2659 269,2639 253,2623 253,2595 269,2579 269,2559 253,2543 199,2543 183,2559 183,2587 199,2603 199,2623 183,2639 183,2667 199,2683 199,2703 183,2719 183,2747 199,2763 199,2783 183,2799 183,2827 199,2843 199,2863 183,2879 129,2879 113,2863 113,2835 129,2819 129,2799 113,2783 113,2755 129,2739 129,2719 113,2703 113,2675 129,2659 129,2639 113,2623 113,2595 129,2579 129,2559 113,2543 59,2543 43,2559 43,2587 59,2603 59,2623 43,2639 43,2667 59,2683 59,2703 43,2719 43,2747 59,2763 59,2783 43,2799 43,2827 59,2843 59,2863 43,2879 43,2907 59,2923 59,2943 43,2959 43,2987 59,3003 59,3023 43,3039 43,3067 59,3083 59,3103 43,3119 43,3147 59,3163 59,3183 43,3199 43,3227 59,3243 59,3263 43,3279 43,3307 59,3323 59,3343 43,3359 43,3387 59,3403 59,3423 43,3439 43,3467 59,3483 59,3503 43,3519 43,3547 59,3563 59,3583 43,3599 43,3627 59,3643 59,3663 43,3679 43,3707 59,3723 59,3743 43,3759 43,3787 59,3803 59,3823 43,3839 43,3867 59,3883 59,3903 43,3919 43,3947 59,3963 59,3983 43,3999 43,4027 59,4043 59,4063 43,4079 43,4107 59,4123 59,4143 43,4159 43,4187 59,4203 59,4223 43,4239 43,4267 59,4283 59,4303 43,4319 43,4347 59,4363 59,4383 43,4399 43,4427 59,4443 59,4463 43,4479 43,4507 59,4523 59,4543 43,4559 43,4587 59,4603 59,4623 43,4639 43,4667 59,4683 59,4703 43,4719 43,4747 68,4772 104,4772 158,4718 186,4718 208,4696 208,4668 226,4650 254,4650 276,4628 276,4600 294,4582 322,4582 344,4560 344,4532 362,4514 390,4514 412,4492 412,4464 430,4446 458,4446 480,4424 480,4396 498,4378 526,4378 548,4356 548,4328 566,4310 594,4310 616,4288 616,4260 634,4242 662,4242 684,4220 684,4192 702,4174 730,4174 752,4152 752,4124 770,4106 798,4106 820,4084 820,4056 838,4038 866,4038 888,4016 888,3988 906,3970 934,3970 956,3948 956,3920 974,3902 1002,3902 1024,3880 1024,3852 1042,3834 1157,3834 1215,3892 1290,3892 1487,3695 1487,3300.2 P3.39@1537.2,3250
F16: "LEFT HDR.36" P3.40 | length 6979.2
  Mid-Layer 1 w8: v1(1200,3250) P3.40@1437.2,3250
  Mid-Layer 2 w8: v1(1100,3250) v1(1200,3250)
  Bottom Layer w8: 600,3150 656,3206 656,3554 687,3585 789,3585 809,3605 809,3638 790,3657 651,3657 639,3669 639,3694 651,3706 830,3706 865,3671 1159,3671 1169,3681 1169,3694 1159,3704 884,3704 817,3771 817,3800 798,3819 766,3819 746,3799 746,3769 716,3739 689,3739 676,3752 676,3771 687,3782 687,3814 679,3822 679,3847 692,3860 692,3887 680,3899 631,3899 619,3887 619,3860 631,3848 631,3825 619,3813 619,3789 632,3776 632,3749 622,3739 575,3739 565,3749 565,3776 577,3788 577,3810 565,3822 565,3849 577,3861 577,3883 565,3895 565,3922 577,3934 577,3956 565,3968 565,3995 577,4007 577,4034 565,4046 516,4046 504,4034 504,4007 516,3995 516,3973 504,3961 504,3934 516,3922 516,3900 504,3888 504,3861 516,3849 516,3827 504,3815 504,3790 517,3777 517,3750 507,3740 460,3740 450,3750 450,3777 462,3789 462,3811 450,3823 450,3850 462,3862 462,3884 450,3896 450,3923 462,3935 462,3957 450,3969 450,3996 462,4008 462,4030 450,4042 450,4069 462,4081 462,4108 450,4120 401,4120 389,4108 389,4081 401,4069 401,4047 389,4035 389,4008 401,3996 401,3974 389,3962 389,3935 401,3923 401,3901 389,3889 389,3862 401,3850 401,3828 389,3816 389,3789 401,3777 401,3750 391,3740 344,3740 334,3750 334,3777 346,3789 346,3811 334,3823 334,3850 346,3862 346,3884 334,3896 334,3923 346,3935 346,3957 334,3969 334,3996 346,4008 346,4030 334,4042 334,4069 346,4081 346,4103 334,4115 334,4142 346,4154 346,4176 334,4188 334,4215 346,4227 346,4249 361,4264 410,4264 426,4248 426,4223 438,4211 463,4211 479,4195 479,4170 491,4158 516,4158 532,4142 532,4117 544,4105 569,4105 585,4089 585,4064 597,4052 622,4052 638,4036 638,4011 650,3999 675,3999 691,3983 691,3958 703,3946 728,3946 744,3930 744,3905 756,3893 781,3893 797,3877 797,3852 809,3840 834,3840 850,3824 850,3799 862,3787 887,3787 903,3771 903,3746 915,3734 1214,3734 1233,3715 1233,3695 1047,3509 1047,3303 v1(1100,3250)
F17: "TOP HDR.3" H2.39 | length 6954.1
  Top Layer w8: H2.39@1737.2,3250 v1@2150,3250
  Mid-Layer 1 w8: 1800,4400 1733,4333 1470,4333 1405,4398 1405,4446 1374,4477 1165,4477 1133,4445 1133,4384 1391,4126 1406,4126 1421,4141 1421,4154 1169,4406 1169,4423 1185,4439 1200,4439 1451,4188 1463,4188 1477,4202 1477,4217 1289,4405 1289,4422 1301,4434 1317,4434 1460,4291 2364,4291 2502,4153 2502,4078 2268,3844 2217,3844 2171,3890 2171,4151 2135,4187 1564,4187 1517,4140 1517,4065 1707,3875 2079,3875 2150,3804 v1(2150,3251)